# Altium PCB PCB2.PcbDoc (part 2 of 3)
Units mil, origin at the board's own origin, x right, y up, seen from the top; angles counter-clockwise.
Board outline 9010 x 4600 mil, 2 copper layers (Top Layer, Bottom Layer); 234 components, 289 nets, 937 pads, 186 vias.
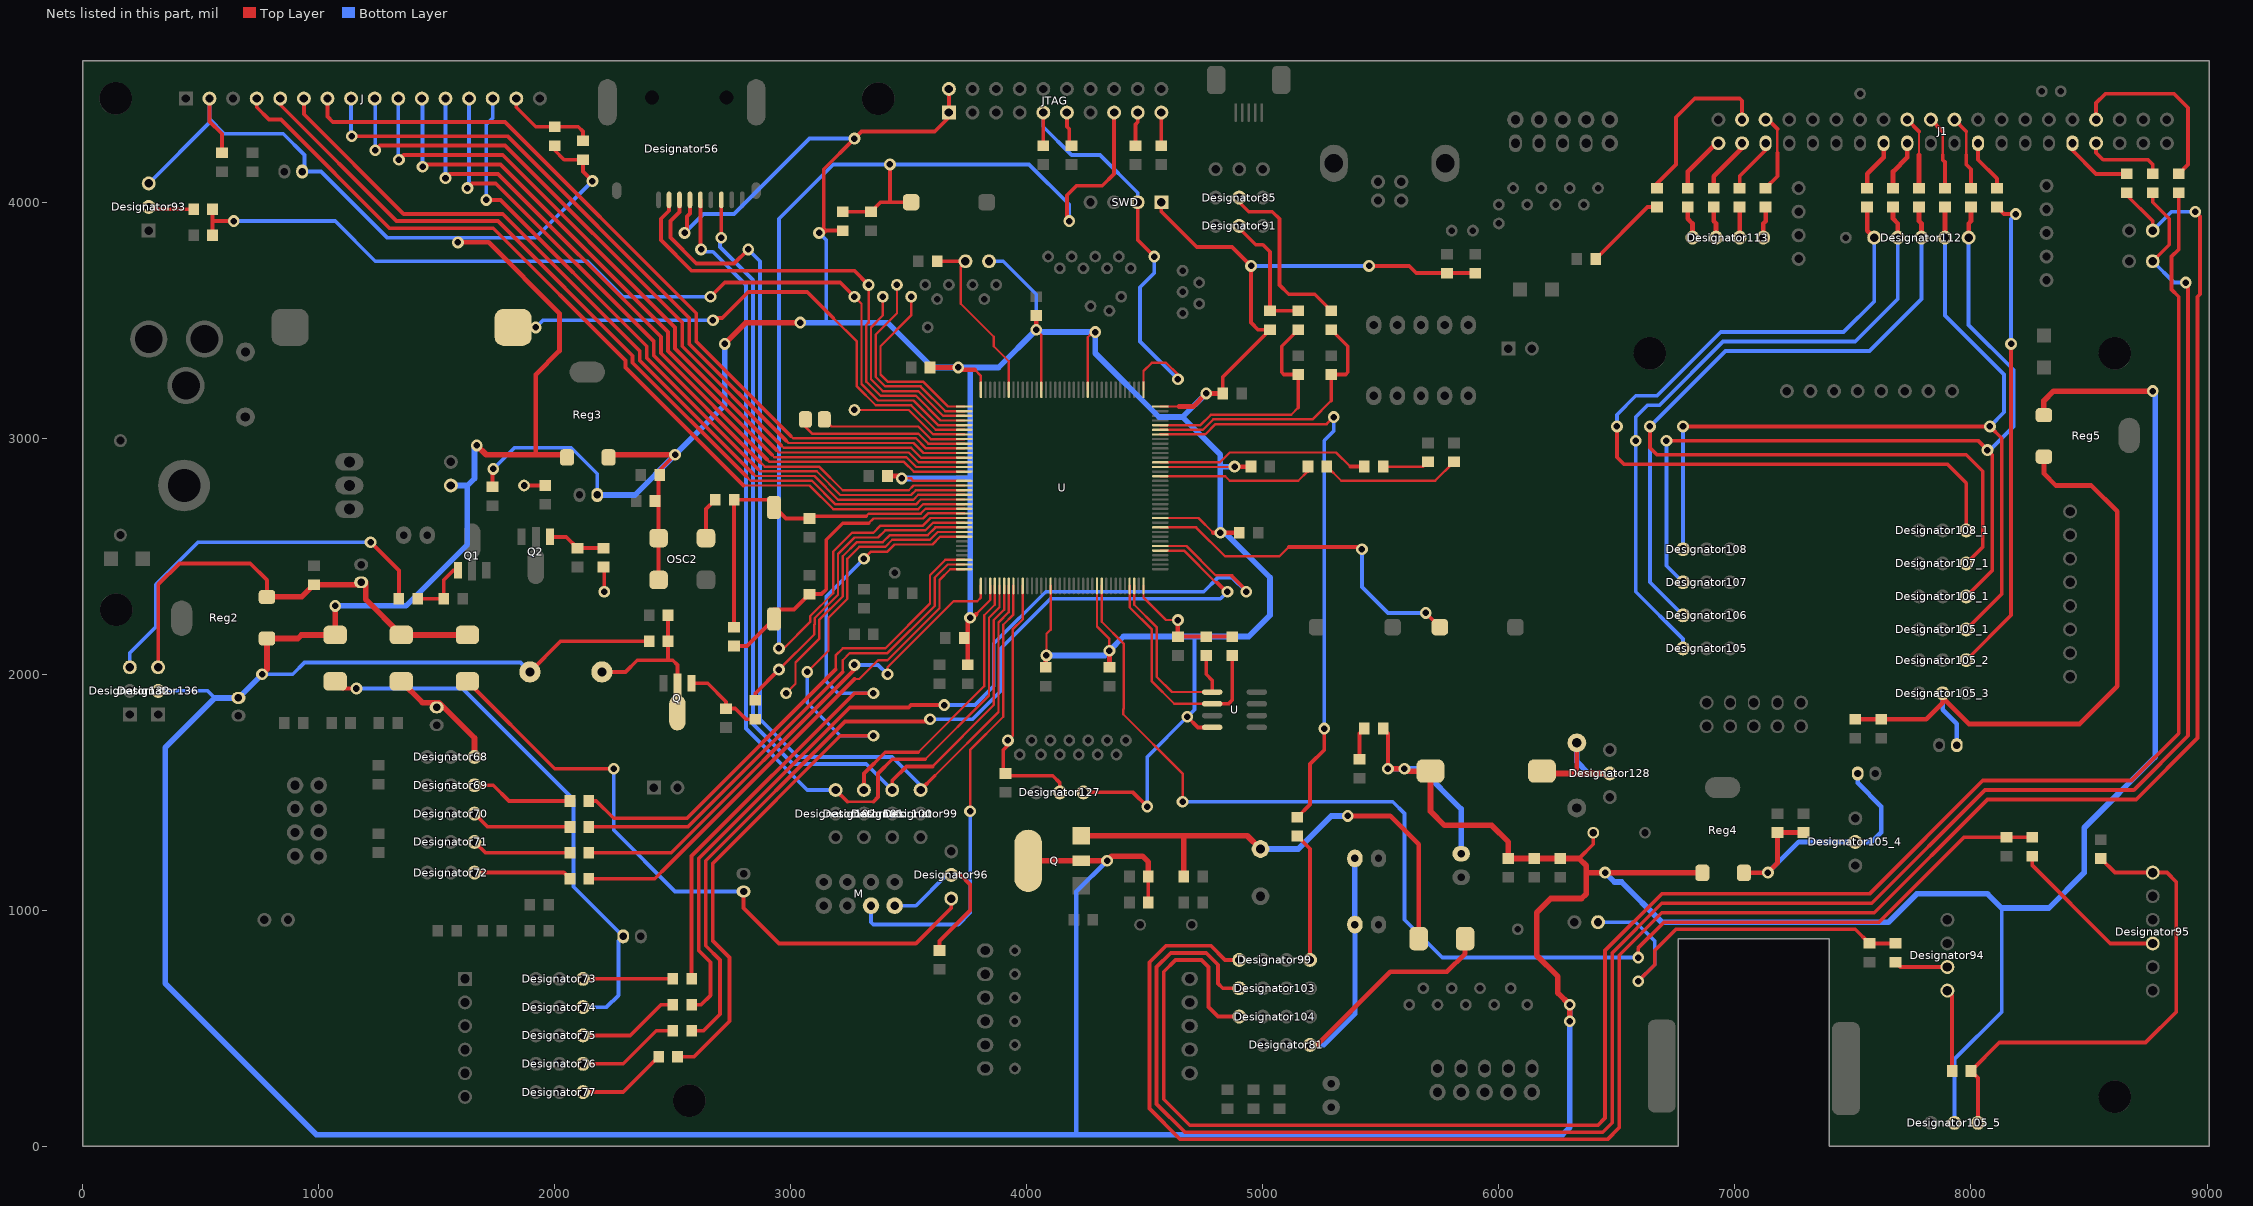
[diagram p2: the nets of this part, all layers, seen from the top]

## Via types
v1: diameter 50, hole 27.56, Top Layer to Bottom Layer, 186 vias

## Nets (pads, with @x,y where several pads share a name; then routed paths per layer and width w, separated by ;. In a path a pad name is that pad's centre, name@x,y a point inside that pad or via, vN(x,y) a via of type N, cw(c..) or ccw(c..) an arc to the next point about the centre after c; other vN are vias at no path point) (continued)
NewNet9: C7.0@4900,2600 C8.0@4950,2880 C9.0@4830,3190 C11.0@4040,3520 C12.0@3590,3300 C13.0@3410,2840 C18.0@3750,2040 C19.0@4080,2030 C20.0@4350,2030 C21.0@4640,2160 Designator56.Vdd Designator57.2 Designator127.3 Designator130.1 JTAG.Vcc OSC2.En OSC2.Vdd R33.0@4760,2160 R34.0@4870,2160 R36_6.0@5030,3460 R36_11.0@3220,3880 R36_20.0@5900,3700 R36_21.0@5780,3700 R54_1.0@2424.88,2733.86 R54_2.0@2444.88,2843.86 R55.0@3734.88,2153.86 R61.0@1736.14,2794.88 Reg3.Out SWD.VDD U.Vcc U.VDD_1 U.VDD_2 U.VDD_3 U.VDD_4 U.VDD_5 U.VDD_6 U.VDD_7 U.VDD_8 U.VDD_9 U.VDD_10 U.VDD_11 | length 18640.5
  Top Layer w10: v1(3470,2830) 3510,2830 3520.47,2819.53 U.VDD_5@3734.65,2819.53 ; 3780,3290 3805.51,3264.49 U.VDD_3@3805.51,3205.35 ; 3784.88,2254.88 3844.88,2314.88 U.VDD_4@3844.88,2374.65 ; v1(4040,3460) 4061.42,3438.58 U.VDD_11@4061.42,3205.35 ; v1(4083.37,2080) 4083.37,2171.79 4100.79,2189.21 U.VDD_6@4100.79,2374.65 ; U.VDD_10@4258.27,3205.35 4258.27,3428.27 v1@4270,3440 ; U.VDD_7@4297.64,2374.65 4297.64,2202.36 4350,2150 v1(4350,2100) ; U.VDD_1@4494.49,2374.65 4494.49,2325.51 4590,2230 v1(4640,2230) ; U.VDD_8@4565.35,2662.05 4727.95,2662.05 4790,2600 ; U.VDD_9@4565.35,2878.58 4878.58,2878.58 v1(4880,2880) ; U.VDD_2@4565.35,3134.49 4644.49,3134.49
  Top Layer w16: R61.0@1736.14,2794.88 1736.14,2866.14 v1(1740,2870) ; OSC2.En@2440,2400 OSC2.Vdd@2440,2577.16 2440,2860 v1(2510,2930) ; v1@2560,3890 2560,3940 2572.87,3952.87 Designator56.Vdd@2572.87,4010 ; R36_11.0@3220,3880 3150,3880 ; JTAG.Vcc@3670,4480 JTAG.Vcc@3670,4380 3670,4360 3610,4300 3300,4300 v1(3270,4270) 3140,4140 3140,3890 ; Designator127.3@4240,1500 4450,1500 v1(4510,1440) ; SWD.VDD@4570,4000 4570,3960 4720,3810 4870,3810 v1(4950,3730) 4950,3490 4980,3460 R36_6.0@5030,3460 4830,3260 C9.0@4830,3190 ; C21.0@4640,2160 R33.0@4760,2160 R34.0@4870,2160 ; v1(4680,1820) 4725,1775 U.Vcc@4785.51,1775 ; v1(5450,3730) 5620,3730 5650,3700 R36_21.0@5780,3700 R36_20.0@5900,3700 ; 3140,3890 3150,3880 ; 3140,3890 v1(3120,3870) 3140,3870 3150,3880
  Top Layer w20: C13.0@3410,2840 3460,2840 v1(3470,2830) ; C12.0@3590,3300 v1(3710,3300) ; v1@3720,3290 3780,3290 ; C18.0@3750,2040 3750,2230 v1(3760,2240) ; v1@3760,2230 3784.88,2254.88 ; v1(4040,3460) C11.0@4040,3520 ; C19.0@4080,2030 4080,2076.63 v1(4083.37,2080) ; C20.0@4350,2030 v1(4350,2100) ; C21.0@4640,2160 v1(4640,2230) ; 4644.49,3134.49 4704.49,3134.49 v1(4760,3190) C9.0@4830,3190 ; 4790,2600 v1(4820,2600) C7.0@4900,2600 ; v1(4880,2880) C8.0@4950,2880
  Top Layer w24: Reg3.Out@2228,2919 2239,2930 v1(2510,2930) ; v1(2720,3400) 2810,3490 v1(3040,3490)
  Bottom Layer w16: v1(1740,2870) 1830,2960 2070,2960 2180,2850 Designator130.1@2180,2760 ; v1(2550,3870) 2630,3950 2760,3950 3080,4270 v1(3270,4270) ; v1(3120,3870) 3150,3840 3150,3490 ; Designator57.2@3840,3750 3900,3750 4040,3610 v1(4040,3460) ; v1(4510,1440) 4510,1650 v1(4680,1820) 4710,1850 4710,2160 ; 4640,2160 v1(4640,2230) ; v1(4950,3730) v1(5450,3730)
  Bottom Layer w24: Designator130.1@2180,2760 2340,2760 v1(2510,2930) 2720,3140 v1(2720,3400) ; v1(3040,3490) 3150,3490 3410,3490 3600,3300 v1(3710,3300) 3880,3300 v1(4040,3460) 4050,3450 v1(4290,3450) 4290,3360 4560,3090 4660,3090 ; v1(3470,2830) 3760,2830 ; v1(3760,2240) 3760,2830 ; 3760,3300 3760,2830 ; v1(4083.37,2080) 4330,2080 v1(4350,2100) 4410,2160 4710,2160 4940,2160 5030,2250 5030,2410 4840,2600 v1(4820,2600) 4820,2880 ; v1(4760,3190) 4660,3090 ; v1(4880,2880) 4820,2880 ; 4660,3090 4820,2930 4820,2880
NewNet10: pad.0@1870,2800 R60.0@1960,2800 | length 90
  Top Layer w16: pad.0@1870,2800 R60.0@1960,2800
NewNet11: C28.2 C31.0@6040,1220 C34.0@6150,1220 C35.0@6260,1220 C36.0@590,4210 Designator49_1.2 Designator61.1 Designator93.Vcc5V Designator105_5.2 Designator118.0@5710,1590 Designator122.0@1070,2166.85 Designator133.1 Designator134.0 Designator136.2 Designator137.1 J.vcc@537.32,4439.37 LED4.0@5510,1770 Q.C R21.0@4514.88,1033.86 R22.0@4514.88,1143.86 R36_12.0@2120,4180 R36_13.0@2000,4240 R53.0@2400,2140 Reg2.In Reg3.In Reg4.In Reg5.In | length 27762.1
  Top Layer w16: J.vcc@537.32,4439.37 537.32,4342.68 590,4290 C36.0@590,4210 ; Designator49_1.2@1895,2010 2025,2140 R53.0@2400,2140 ; R36_13.0@2000,4240 2000,4220 2040,4180 R36_12.0@2120,4180 2120,4130 v1(2160,4090) ; R21.0@4514.88,1033.86 R22.0@4514.88,1143.86 ; LED4.0@5510,1770 5530,1750 v1(5530,1600) ; 6340,1220 6400,1280 Designator134.0@6400,1329
  Top Layer w20: v1(1590,3830) 1720,3830 2020,3530 2020,3370 1920,3270 1920,2930
  Top Layer w24: v1(760,2000) 781,2021 Reg2.In@781,2152 912,2152 926.85,2166.85 Designator122.0@1070,2166.85 v1(1070,2290) ; v1(1670,2970) 1710,2930 Reg3.In@2060,2930 ; 1920,2930 2041,2930 Reg3.In@2052,2919 ; Q.C@4250,1210 v1(4340,1210) 4360,1230 4490,1230 4514.88,1205.12 R22.0@4514.88,1143.86 ; v1(5530,1600) v1(5600,1600) 5610,1590 Designator118.0@5710,1590 5710,1420 5770,1360 5970,1360 6040,1290 C31.0@6040,1220 C34.0@6150,1220 C35.0@6260,1220 6340,1220 6370,1190 6370,1160 ; v1(6300,530) v1(6300,600) 6250,650 6250,720 6160,810 6160,990 6220,1050 6350,1050 6370,1070 6370,1160 ; Reg4.In@6862,1159 6451,1159 v1(6450,1160) 6370,1160 ; Reg5.In@8309,3098 8309,3159 8350,3200 v1(8770,3200)
  Bottom Layer w16: Designator93.Vcc5V@280,4080 537.32,4337.32 537.32,4352.68 ; Designator136.2@320,1930 530,1930 560,1900 ; J.vcc@537.32,4439.37 537.32,4352.68 ; v1(760,2000) 890,2000 940,2050 1855,2050 Designator49_1.2@1895,2010 ; Designator137.1@930,4130 1010,4130 1290,3850 1920,3850 v1(2160,4090) ; Designator137.1@940,4130 940,4200 850,4290 600,4290 537.32,4352.68 ; Designator105_5.2@7930,100 7930,370 8130,570 8130,1010
  Bottom Layer w20: 4210,50 4210,1080 v1(4340,1210)
  Bottom Layer w24: v1(760,2000) Designator133.1@660,1900 560,1900 350,1690 350,690 990,50 4210,50 6270,50 6300,80 v1(6300,530) v1(6300,600) ; Designator137.1@930,4130 Designator137.1@940,4130 ; v1(1070,2290) 1370,2290 1630,2550 1630,2800 ; Designator61.1@1560,2800 1630,2800 ; v1(1670,2970) 1660,2960 1660,2830 1630,2800 ; v1(5530,1600) v1(5600,1600) 5670,1600 5840,1430 C28.2@5840,1240 ; v1(6450,1160) 6490,1120 6520,1120 6690,950 7650,950 7770,1070 8070,1070 8130,1010 8330,1010 8480,1160 8480,1350 8780,1650 8780,3190 v1(8770,3200)
NewNet12: Q1.1@1590,2440 R58.0@1530,2320 R59.0@1420,2320 | length 266.6
  Top Layer w16: R59.0@1420,2320 R58.0@1530,2320 1530,2400 1570,2440 Q1.1@1590,2440
NewNet13: Designator132.3 R59.0@1340,2320 | length 1669.8
  Top Layer w16: v1(1220,2560) 1340,2440 R59.0@1340,2320
  Bottom Layer w16: Designator132.3@200,2030 200,2090 310,2200 310,2380 490,2560 v1(1220,2560)
NewNet14: pad.0@2210,2350 R57.0@2206.14,2454.88 | length 106.5
  Top Layer w16: R57.0@2206.14,2454.88 2210,2451.02 pad.0@2210,2350
NewNet15: Q2.1@1980,2582 R56.0@2096.14,2534.88 R57.0@2206.14,2534.88 | length 245.7
  Top Layer w16: Q2.1@1980,2582 2049.02,2582 R56.0@2096.14,2534.88 R57.0@2206.14,2534.88
NewNet16: LED4.0@5430,1770 R36_18.0@5410,1640 | length 110
  Top Layer w16: R36_18.0@5410,1640 LED4.0@5410,1750
NewNet17: C30.0@3910,1580 Designator127.2 U.PB0 | length 1113.7
  Top Layer w10: v1(3920,1720) 3940,1740 3940,2190 3982.68,2232.68 U.PB0@3982.68,2374.65
  Top Layer w16: v1(3920,1720) 3920,1700 3900,1680 3900,1600 3930,1570 4110,1570 4140,1540 Designator127.2@4140,1500
NewNet18: Designator49_1.1 Q.1@2520,1837 Q.2 R53.0@2480,2140 R54.0@2480,2250 | length 625
  Top Layer w16: Designator49_1.1@2200,2010 2300,2010 2350,2060 2500,2060 2520,2040 Q.2@2520,1954 ; 2480,2060 R53.0@2480,2140 R54.0@2480,2250
NewNet19: C.1 Designator125.0@5660,880 Q.E R23.0@4664.88,1143.86 | length 2135.2
  Top Layer w20: v1(5360,1400) 5540,1400 5660,1280 Designator125.0@5660,880
  Top Layer w24: Q.E@4230,1316 4670,1316 ; R23.0@4664.88,1143.86 4664.88,1310.88 4670,1316 ; C.1@4990,1260 4934,1316 4670,1316
  Bottom Layer w24: C.1@4990,1260 5150,1260 5290,1400 v1(5360,1400)
NewNet20: C15.2 C16.2 Designator81.3 Designator125.0@5856.85,880 | length 1798.2
  Top Layer w20: Designator81.3@5200,430 5230,430 5540,740 5780,740 5856.85,816.85 Designator125.0@5856.85,880
  Bottom Layer w20: Designator81.3@5200,430 5260,430 5390,560 C15.2@5390,940
  Bottom Layer w24: C15.2@5380,930 C15.2@5390,940 C16.2@5390,1220
NewNet21: Designator68.3 Designator124.0@1350,1970 Designator135.1 | length 489.4
  Top Layer w24: Designator124.0@1350,1970 1440,1880 1510,1880 1660,1730 Designator68.3@1660,1650
NewNet22: C.0@980,2380 Designator123.0@1630,2166.85 Designator124.0@1350,2166.85 Designator131.1 Designator136.3 Reg2.Out | length 1958.7
  Top Layer w16: Designator136.3@320,2030 320,2380 410,2470 710,2470 781,2399 Reg2.Out@781,2328
  Top Layer w24: Reg2.Out@781,2328 928,2328 C.0@980,2380 1170,2380 Designator131.1@1180,2390 1200,2390 1200,2316.85 Designator124.0@1350,2166.85 Designator123.0@1630,2166.85
NewNet23: Designator96.1 Designator123.0@1630,1970 Designator126.1 | length 2805.2
  Top Layer w16: Designator123.0@1630,1970 2000,1600 v1(2250,1600) ; Designator126.1@2800,1080 2800,1010 2950,860 3530,860 3680,1010 Designator96.1@3680,1050
  Bottom Layer w16: v1(2250,1600) 2250,1340 2510,1080 Designator126.1@2800,1080
NewNet24: Designator74.3 Designator122.0@1070,1970 Designator129.1 | length 2313.1
  Top Layer w16: Designator122.0@1070,1970 1100,1940 v1(1160,1940)
  Bottom Layer w16: v1(1160,1940) 1610,1940 2080,1470 2080,1100 Designator129.1@2290,890 2270,870 2270,640 2220,590 Designator74.3@2120,590
NewNet25: 
NewNet26: Q.1@2580,1962 R51.0@2850,1810 R52.0@2726.14,1854.88 | length 354
  Top Layer w16: Q.1@2582.88,1964.88 Q.1@2580,1962 2648,1962 2726.14,1883.86 R52.0@2726.14,1854.88 2765.12,1854.88 2810,1810 R51.0@2850,1810
NewNet27: R51.0@2850,1890 U.PC0 | length 1354.4
  Top Layer w10: v1(2950,2020) 3100,2170 3100,2210 3101,2211 3101,2237.87 3200,2336.87 3200,2510 3270,2580 3370,2580 3400,2610 3570,2610 3602.36,2642.36 U.PC0@3734.65,2642.36
  Top Layer w16: R51.0@2850,1890 2850,1920 v1(2950,2020)
NewNet28: Designator95.Vcc5v Designator105_5.3 R45.0@8000,320 R50.0@8550,1220 | length 2117.4
  Top Layer w16: Designator105_5.3@8030,100 8030,290 R45.0@8000,320 8120,440 8740,440 8870,570 8870,1120 8830,1160 Designator95.Vcc5v@8770,1160 8610,1160 R50.0@8550,1220
NewNet29: Designator95.Beep R49.0@8260,1230 | length 686.7
  Top Layer w16: R49.0@8260,1230 8260,1190 8590,860 Designator95.Beep@8770,860
NewNet30: R48.0@8150,1310 R49.0@8260,1310 U.PE10 | length 5429.1
  Top Layer w10: U.PE10@4317.32,2374.65 4317.32,2222.68 4410,2130 4410,1853.64 4409,1852.64 4409,1831 4660,1580 v1(4660,1460)
  Top Layer w16: v1(6590,800) 6590,840 6700,950 7610,950 7970,1310 R48.0@8150,1310 R49.0@8260,1310
  Bottom Layer w16: v1(4660,1460) 5550,1460 5600,1410 5600,960 5760,800 v1(6590,800)
NewNet31: Designator60.2 R46.0@7680,860 R47.0@7570,860 | length 1713.3
  Top Layer w16: v1(6590,700) 6660,770 6660,830 6750,920 7510,920 R47.0@7570,860 R46.0@7680,860
  Bottom Layer w16: Designator60.2@6420,950 6580,950 6660,870 6660,770 v1(6590,700)
NewNet32: Designator94.TX R46.0@7680,780 | length 228.3
  Top Layer w16: R46.0@7680,780 7700,760 Designator94.TX@7900,760
NewNet33: Designator94.Sel R45.0@7920,320 | length 348.3
  Top Layer w16: Designator94.Sel@7900,660 7920,640 R45.0@7920,320
NewNet34: C32.0@7620,1810 C33.0@7510,1810 Designator105_3.2 Designator120.1 Reg5.Out | length 2734.4
  Top Layer w20: C33.0@7510,1810 C32.0@7620,1810 7810,1810 7880,1880 Designator105_3.2@7880,1900 ; Designator105_3.2@7880,1920 Designator105_3.2@7880,1900 ; Reg5.Out@8309,2922 8309,2851 8360,2800 8510,2800 8620,2690 8620,1950 8460,1790 7990,1790 Designator105_3.2@7880,1900
  Bottom Layer w20: Designator105_3.2@7880,1920 7880,1850 7940,1790 Designator120.1@7940,1700 Designator120.1@7940,1690
NewNet35: C10.0@7180,1330 C29.0@7290,1330 Designator105_4.2 Designator121.1 Reg4.Out | length 1240.8
  Top Layer w16: Reg4.Out@7038,1159 Reg4.Out@7039,1160
  Top Layer w20: Reg4.Out@7039,1160 v1(7140,1160) 7180,1200 C10.0@7180,1330 C29.0@7290,1330
  Bottom Layer w20: v1(7140,1160) 7270,1290 Designator105_4.2@7510,1290 7580,1290 7620,1330 7620,1440 7520,1540 Designator121.1@7520,1580
NewNet36: Designator118.0@6182.44,1590 Designator121.K Designator128.2 | length 661.6
  Top Layer w20: 6330,1580 6330.43,1580.43 Designator121.K@6330.43,1709.6
  Top Layer w24: Designator118.0@6182.44,1590 6192.44,1580 Designator128.2@6470,1580
  Bottom Layer w24: Designator121.K@6330.43,1709.6 6330.43,1629.57 6380,1580 Designator128.2@6470,1580
NewNet37: R36_16.0@550,3860 R36_17.0@550,3970 U.PE6 | length 3901.5
  Top Layer w10: v1(3270,3600) 3300,3570 3300,3230 3370,3160 3520,3160 3624.25,3055.75 U.PE6@3734.65,3055.75
  Top Layer w16: R36_16.0@550,3860 550,3920 ; R36_17.0@550,3970 550,3920 ; v1(640,3920) 550,3920 ; v1(2660,3600) 2720,3660 3210,3660 v1(3270,3600)
  Bottom Layer w16: v1(640,3920) 1070,3920 1240,3750 2140,3750 2290,3600 v1(2660,3600)
NewNet38: Designator93.Out R36_17.0@470,3970 | length 194.1
  Top Layer w16: Designator93.Out@280,3980 290,3970 R36_17.0@470,3970
NewNet39: Designator99.4 R44.0@5146.14,1314.88 | length 547.2
  Top Layer w16: R44.0@5146.14,1314.88 5195.64,1265.38 5200,1261.02 5200,860 Designator99.4@5200,790
NewNet40: R44.0@5146.14,1394.88 U.PA10-USART1-RX | length 2524
  Top Layer w10: U.PA10-USART1-RX@4565.35,3016.38 4756.38,3016.38 4800,3060 5270,3060 v1(5300,3090)
  Top Layer w16: R44.0@5146.14,1394.88 5200,1448.74 5200,1620 5260,1680 v1(5260,1770)
  Bottom Layer w16: v1(5260,1770) 5260,2990 5300,3030 v1(5300,3090)
NewNet41: Designator104.1 R43.0@8880,4040 | length 8843.6
  Top Layer w16: Designator104.1@4900,550 4810,550 4770,590 4770,760 4740,790 4630,790 4580,740 4580,200 4690,90 6420,90 6450,120 6450,830 6690,1070 7570,1070 8050,1550 8680,1550 8880,1750 8880,3600 8850,3630 8850,3770 8880,3800 R43.0@8880,4040
NewNet42: J1.GPIO4 R43.0@8880,4120 | length 798
  Top Layer w16: J1.GPIO4@8530,4350 8530,4420 8570,4460 8860,4460 8920,4400 8920,4160 R43.0@8880,4120
NewNet43: Designator105_2.3 R42.0@8110,3980 | length 2069.4
  Top Layer w16: Designator105_2.3@7980,2060 8170,2250 v1(8170,3400) ; R42.0@8110,3980 8140,3950 v1(8190,3950)
  Bottom Layer w16: v1(8170,3400) 8170,3930 v1(8190,3950)
NewNet44: J1.GPIO24 R42.0@8110,4060 | length 223.1
  Top Layer w16: J1.GPIO24@8030,4250 8030,4180 8110,4100 R42.0@8110,4060
NewNet45: Designator99.1@4900,790 Designator115.2 R41.0@8660,4040 | length 9340.6
  Top Layer w16: Designator99.1@4900,790 4840,790 4780,850 4590,850 4520,780 4520,160 4650,30 6460,30 6510,80 6510,810 6690,990 7590,990 8070,1470 8700,1470 8960,1730 8960,3600 8970,3610 8970,3940 v1(8950,3960) ; R41.0@8660,4040 8660,4030 8770,3920 Designator115.2@8770,3880
  Bottom Layer w16: Designator115.2@8770,3880 8850,3960 v1(8950,3960)
NewNet46: J1.GPIO15-RX R41.0@8660,4120 | length 301.4
  Top Layer w16: J1.GPIO15-RX@8430,4250 8430,4220 8530,4120 R41.0@8660,4120
NewNet47: Designator103.1 Designator116.2 R40.0@8770,4040 | length 9046.5
  Top Layer w16: Designator103.1@4900,670 4830,670 4810,690 4810,770 4760,820 4610,820 4550,760 4550,180 4670,60 6440,60 6480,100 6480,820 6690,1030 7580,1030 8060,1510 8690,1510 8920,1740 v1@8920,3660 ; Designator116.2@8770,3750 8840,3820 8840,3930 8770,4000 R40.0@8770,4040
  Bottom Layer w16: Designator116.2@8770,3750 8860,3660 v1(8910,3660)
NewNet48: J1.GPIO14-TX R40.0@8770,4120 | length 340.7
  Top Layer w16: J1.GPIO14-TX@8530,4250 8530,4210 8560,4180 8750,4180 8770,4160 R40.0@8770,4120
NewNet49: LED3.0@6410,3760 R36_15.0@6670,3980 | length 351.1
  Top Layer w16: LED3.0@6410,3760 6630,3980 R36_15.0@6670,3980
NewNet50: J1.GPIO26 R36_15.0@6670,4060 | length 730.4
  Top Layer w16: R36_15.0@6670,4060 6670,4080 6750,4160 6750,4360 6830,4440 7020,4440 7030,4430 J1.GPIO26@7030,4350
NewNet51: Designator57.1 R36_14.0@3620,3750 U.BOOT0 | length 757.3
  Top Layer w10: Designator57.1@3740,3750 3720,3730 3720,3570 3860,3430 3860,3390 3923.62,3326.38 U.BOOT0@3923.62,3205.35
  Top Layer w16: R36_14.0@3620,3750 Designator57.1@3740,3750
NewNet52: J.BLA R36_12.0@2120,4260 R36_13.0@2000,4320 | length 401.9
  Top Layer w16: J.BLA@1837.32,4439.37 1837.32,4402.68 1920,4320 R36_13.0@2000,4320 2100,4320 2120,4300 R36_12.0@2120,4260
NewNet53: C27.0@3340,3960 JTAG.NRST R36_11.0@3220,3960 RST.1 U.NRST | length 5488.3
  Top Layer w10: v1@2950,2130 2970,2110 3082,2222 3082,2245.74 3180,2343.74 3180,2520 3260,2600 3350,2600 3380,2630 3560,2630 3592.05,2662.05 U.NRST@3734.65,2662.05
  Top Layer w16: R36_11.0@3220,3960 C27.0@3340,3960 3380,4000 3420,4000 ; v1(3420,4160) 3420,4000 ; RST.1@3510,4000 3420,4000 ; v1@4170,3930 4170,4030 4210,4070 4320,4070 4370,4120 JTAG.NRST@4370,4380
  Bottom Layer w16: v1(2950,2110) 2950,3930 3180,4160 v1(3420,4160) 4010,4160 4180,3990 v1(4180,3920)
NewNet54: JTAG.TCLK--SWCLK-pulldown R36_10.0@4070,4240 SWD.SWCLK U.PA14-TCK-SWCLK | length 1906.2
  Top Layer w10: U.PA14-TCK-SWCLK@4494.49,3205.35 4494.49,3284.49 4530,3320 4590,3320 4640,3270 v1(4640,3250)
  Top Layer w16: R36_10.0@4070,4240 JTAG.TCLK--SWCLK-pulldown@4070,4380 ; SWD.SWCLK@4470,4000 4470,3840 v1(4540,3770)
  Bottom Layer w16: JTAG.TCLK--SWCLK-pulldown@4070,4380 4070,4320 4190,4200 4310,4200 4470,4040 SWD.SWCLK@4470,4000 ; v1(4540,3770) 4540,3700 4480,3640 4480,3410 v1(4640,3250)
NewNet55: JTAG.pullDown@4170,4380 R36_9.0@4190,4240 | length 144.1
  Top Layer w16: JTAG.pullDown@4170,4380 4170,4320 4180,4310 R36_9.0@4180,4240
NewNet56: JTAG.pulldown R36_8.0@4460,4240 | length 144.1
  Top Layer w16: R36_8.0@4460,4240 4460,4330 4470,4340 JTAG.pulldown@4470,4380
NewNet57: JTAG.pullDown@4570,4380 R36_7.0@4570,4240 | length 140
  Top Layer w16: R36_7.0@4570,4240 JTAG.pullDown@4570,4380
NewNet58: Designator91.2 R36_5.0@5150,3540 R36_6.0@5030,3540 | length 551.4
  Top Layer w16: Designator91.2@4900,3900 4900,3890 4970,3820 5000,3820 5030,3790 R36_6.0@5030,3540 R36_5.0@5150,3540
NewNet59: C26.0@5150,3270 R36_5.0@5150,3460 U.PA12-USB-DP | length 1038.5
  Top Layer w10: U.PA12-USB-DP@4565.35,3055.75 4735.75,3055.75 4780,3100 5120,3100 5150,3130
  Top Layer w16: 5150,3130 C26.0@5150,3270 5090,3270 5080,3280 5080,3390 R36_5.0@5150,3460
NewNet60: C25.0@5290,3270 R36_4.0@5290,3460 U.PA11-USB-DM | length 1169.1
  Top Layer w10: U.PA11-USB-DM@4565.35,3036.06 4746.06,3036.06 4790,3080 5210,3080 5290,3160
  Top Layer w16: 5290,3160 C25.0@5290,3270 5350,3270 5360,3280 5360,3390 R36_4.0@5290,3460
NewNet61: Designator85.2 R36_4.0@5290,3540 | length 764.6
  Top Layer w16: Designator85.2@4900,4020 4900,4000 4940,3960 5040,3960 5070,3930 5070,3650 5110,3610 5220,3610 R36_4.0@5290,3540
NewNet62: LED1.0@5271.22,2880.83 R36_3.0@5810,2900 | length 597.1
  Top Layer w10: LED1.0@5271.22,2880.83 5332.05,2820 5730,2820 R36_3.0@5810,2900
NewNet63: LED2.0@5430,2880 U.PC6 | length 906.8
  Top Layer w10: U.PC6@4565.35,2898.27 4818.27,2898.27 4860,2940 5310,2940 5370,2880
  Top Layer w16: 5370,2880 LED2.0@5430,2880
NewNet64: LED2.0@5510,2880 R36_2.0@5700,2900 | length 198.3
  Top Layer w10: LED2.0@5510,2880 5680,2880 R36_2.0@5700,2900
NewNet65: LED1.0@5191.22,2880.83 U.PG8 | length 670.5
  Top Layer w10: U.PG8@4565.35,2839.21 4840.79,2839.21 4860,2820 5150,2820 LED1.0@5191.22,2861.22
  Top Layer w16: LED1.0@5191.22,2861.22 LED1.0@5191.22,2880.83
NewNet66: KEY2.1 U.PD13 | length 1486.6
  Top Layer w10: U.PD13@4565.35,2622.68 4717.32,2622.68 4840,2500 5070,2500 5110,2540
  Top Layer w16: 5110,2540 5410,2540 v1(5420,2530) ; v1(5690,2260) KEY2.1@5750,2200
  Bottom Layer w16: v1(5420,2530) 5420,2370 5530,2260 v1(5690,2260)
NewNet67: Designator113.1 R36_1.0@6800,3980 | length 138.3
  Top Layer w20: R36_1.0@6800,3980 6800,3930 6820,3910 Designator113.1@6820,3850
NewNet68: J1.GPIO21-SCLK R36_1.0@6800,4060 | length 249.7
  Top Layer w20: R36_1.0@6800,4060 6800,4130 6920,4250 J1.GPIO21-SCLK@6930,4250
NewNet69: Designator113.2 R37_1.0@6910,3980 | length 134.1
  Top Layer w20: R37_1.0@6910,3980 6910,3920 6920,3910 Designator113.2@6920,3850
NewNet70: J1.GPIO20-MOSI R37_1.0@6910,4060 | length 239.7
  Top Layer w20: R37_1.0@6910,4060 6910,4110 7030,4230 J1.GPIO20-MOSI@7030,4250
NewNet71: Designator113.3 R38_1.0@7020,3980 | length 130
  Top Layer w20: Designator113.3@7020,3850 R38_1.0@7020,3980
NewNet72: J1.GPIO16-CE0 R38_1.0@7020,4060 | length 235.6
  Top Layer w16: R38_1.0@7020,4060 7020,4110 7130,4220 J1.GPIO16-CE0@7130,4250
NewNet73: Designator113.4 R39_1.0@7130,3980 | length 134.1
  Top Layer w20: Designator113.4@7120,3850 7120,3910 7130,3920 R39_1.0@7130,3980
NewNet74: J1.GPIO19-MISO R39_1.0@7130,4060 | length 337.3
  Top Layer w10: 7180,4210 7180,4310
  Top Layer w16: R39_1.0@7130,4060 7180,4110 7180,4210 ; J1.GPIO19-MISO@7130,4350 7140,4350 7180,4310
NewNet75: Designator106_1.3 Designator107.1 Designator112.5 R39.0@8000,3980 | length 3843.7
  Top Layer w16: v1(6710,2990) 8030,2990 v1(8070,2950) 8090,2930 8090,2440 Designator106_1.3@7980,2330
  Top Layer w20: Designator112.5@7990,3850 7990,3910 8000,3920 R39.0@8000,3980
  Bottom Layer w16: v1@6710,3000 v1(6710,2990) 6710,2460 Designator107.1@6780,2390 ; Designator112.5@7990,3850 7990,3480 8180,3290 8180,3050 v1@8080,2950
NewNet76: J1.GPIO10-MOSI R39.0@8000,4060 | length 319
  Top Layer w10: 7980,4200 7980,4300
  Top Layer w16: J1.GPIO10-MOSI@7930,4350 7980,4300 ; 7980,4200 7980,4160 8000,4140 R39.0@8000,4060
NewNet77: Designator105_1.3 Designator108.1 Designator112.4 R38.0@7890,3980 | length 3821.2
  Top Layer w16: v1(6780,3050) v1(8080,3050) 8130,3000 8130,2340 Designator105_1.3@7980,2190
  Top Layer w20: Designator112.4@7890,3850 R38.0@7890,3980
  Bottom Layer w16: Designator108.1@6780,2530 v1(6780,3050) ; Designator112.4@7890,3850 7890,3520 8140,3270 8140,3110 v1(8080,3050)
NewNet78: J1.GPIO9-MISO R38.0@7890,4060 | length 314.9
  Top Layer w10: 7880,4200 7880,4300
  Top Layer w16: J1.GPIO9-MISO@7830,4350 7880,4300 ; 7880,4200 7880,4180 7890,4170 R38.0@7890,4060
NewNet79: Designator106.1 Designator107_1.3 Designator112.3 R37.0@7780,3980 | length 4586.2
  Top Layer w16: v1(6640,3050) 6640,2960 6670,2930 7980,2930 8050,2860 8050,2540 Designator107_1.3@7980,2470
  Top Layer w20: R37.0@7780,3980 7780,3920 7790,3910 Designator112.3@7790,3850
  Bottom Layer w16: Designator106.1@6780,2250 6640,2390 v1(6640,3050) 6960,3370 7570,3370 7790,3590 Designator112.3@7790,3850
NewNet80: J1.GPIO11-SCLK R37.0@7780,4060 | length 310.7
  Top Layer w10: 7780,4200 7780,4300
  Top Layer w16: J1.GPIO11-SCLK@7730,4350 7780,4300
  Top Layer w20: R37.0@7780,4060 7780,4200
NewNet81: Designator105.1 Designator112.2 R36.0@7670,3980 | length 2778.2
  Top Layer w20: R36.0@7670,3980 7670,3930 7690,3910 Designator112.2@7690,3850
  Bottom Layer w16: Designator105.1@6780,2110 6780,2150 6580,2350 v1(6580,2990) 6580,3090 6630,3140 6680,3140 6950,3410 7510,3410 7690,3590 Designator112.2@7690,3850
NewNet82: J1.GPIO8-CE0 R36.0@7670,4060 | length 214.9
  Top Layer w20: R36.0@7670,4060 7670,4130 7730,4190 J1.GPIO8-CE0@7730,4250
NewNet83: Designator108_1.3 Designator112.1 R35.0@7560,3980 | length 3621
  Top Layer w16: v1(6500,3050) 6500,2920 6530,2890 7900,2890 7980,2810 Designator108_1.3@7980,2610
  Top Layer w20: R35.0@7560,3980 7560,3880 Designator112.1@7590,3850
  Bottom Layer w16: v1@6510,3040 v1(6500,3050) 6500,3100 6580,3180 6670,3180 6940,3450 7460,3450 7590,3580 Designator112.1@7590,3850
NewNet84: J1.GPIO7-CE1 R35.0@7560,4060 | length 219
  Top Layer w20: R35.0@7560,4060 7560,4120 7630,4190 J1.GPIO7-CE1@7630,4250
NewNet85: R34.0@4870,2080 U.PB10-I2C2-SCK U.SCL | length 1019.4
  Top Layer w10: U.PB10-I2C2-SCK@4435.43,2374.65 4435.43,2284.57 4530,2190 4530,1970 4625,1875 U.SCL@4785.51,1875
  Top Layer w16: U.SCL@4785.51,1875 4855,1875 4870,1890 R34.0@4870,2080
NewNet86: R33.0@4760,2080 U.PB11-I2C2-SDA U.SDA | length 852
  Top Layer w10: U.PB11-I2C2-SDA@4455.12,2374.65 4455.12,2294.88 4550,2200 4550,1990 4615,1925 U.SDA@4785.51,1925
  Top Layer w16: R33.0@4760,2080 4760,2000 4785.51,1974.49 U.SDA@4785.51,1925
NewNet87: C24.0@3630,830 Designator96.2 M.VCC | length 724.3
  Top Layer w16: C24.0@3630,830 3630,870 3760,1000 3760,1110 3720,1150 Designator96.2@3680,1150
  Bottom Layer w16: M.VCC@3440,1020 3530,1020 3660,1150 Designator96.2@3680,1150
NewNet88: Designator73.3 R32.0@2500,710 | length 380
  Top Layer w16: Designator73.3@2120,710 R32.0@2500,710
NewNet89: R32.0@2580,710 U.PC3 | length 2846.1
  Top Layer w10: v1(3310,2490) 3340,2520 3410,2520 3440,2550 3600,2550 3633.31,2583.31 U.PC3@3734.65,2583.31
  Top Layer w16: R32.0@2580,710 2580,1230 3270,1920 v1(3350,1920)
  Bottom Layer w16: v1(3310,2490) 3150,2330 3150,1970 3200,1920 v1(3350,1920)
NewNet90: Designator75.3 R31.0@2500,600 | length 433.8
  Top Layer w16: Designator75.3@2120,470 2320,470 2450,600 R31.0@2500,600
NewNet91: R31.0@2580,600 U.PD9-USART3-RX | length 4190.3
  Top Layer w10: U.PD9-USART3-RX@4565.35,2543.94 4676.06,2543.94 4800,2420 4860,2420 ; 4860,2420 4870,2420 4930,2360 v1(4930,2350) 4860,2420
  Top Layer w16: R31.0@2580,600 2620,600 2660,640 2660,780 2610,830 2610,1220 3250,1860 3500,1860 3510,1870 v1(3650,1870)
  Bottom Layer w16: v1(3650,1870) 3780,1870 3860,1950 3860,2130 4080,2350 4750,2350 4810,2410 4870,2410 v1(4930,2350)
NewNet92: Designator76.3 R30.0@2500,490 | length 438
  Top Layer w16: Designator76.3@2120,350 2290,350 2430,490 R30.0@2500,490
NewNet93: R30.0@2580,490 U.PD8-USART3-TX | length 4020.7
  Top Layer w10: U.PD8-USART3-TX@4565.35,2524.25 4665.75,2524.25 4800,2390 ; 4800,2390 4840,2350 v1(4850,2350) 4810,2390 4800,2390
  Top Layer w16: R30.0@2580,490 2630,490 2700,560 2700,790 2640,850 2640,1210 3230,1800 v1@3580,1800
  Bottom Layer w16: v1(3590,1810) 3770,1810 3890,1930 3890,2110 4100,2320 4820,2320 v1(4850,2350)
NewNet94: Designator77.3 R29.0@2440,380 | length 387.6
  Top Layer w16: Designator77.3@2120,230 2290,230 R29.0@2440,380 R29.0@2443.86,383.86
NewNet95: R29.0@2520,380 U.PC2 | length 3444.7
  Top Layer w10: v1(3070,2010) 3160,2100 3160,2240 3240,2320 3240,2490 3290,2540 3400,2540 3430,2570 3590,2570 3622.99,2602.99 U.PC2@3734.65,2602.99
  Top Layer w16: R29.0@2520,380 2590,380 2740,530 2740,800 2670,870 2670,1200 3210,1740 v1(3350,1740)
  Bottom Layer w16: v1(3070,2010) 3070,1880 3210,1740 v1(3350,1740)
NewNet96: Designator69.3 R28.0@2064.88,1463.86 | length 432.3
  Top Layer w16: Designator69.3@1660,1530 1740,1530 1806.14,1463.86 R28.0@2064.88,1463.86
NewNet97: R28.0@2144.88,1463.86 U.PA0-WKUP | length 2179.3
  Top Layer w10: 3190,2020 3190,2080 3220,2110 3400,2110 3590,2300 3590,2420 3654.88,2484.88 U.PA0-WKUP@3734.65,2484.88
  Top Layer w16: R28.0@2144.88,1463.86 2176.14,1463.86 2250,1390 2560,1390 3190,2020
NewNet98: Designator70.3 R27.0@2064.88,1353.86 | length 428.1
  Top Layer w16: Designator70.3@1660,1410 1716.14,1353.86 R27.0@2064.88,1353.86
NewNet99: R27.0@2144.88,1353.86 U.PA1 | length 2149.7
  Top Layer w10: 3220,2010 3220,2060 3250,2090 3410,2090 3610,2290 3610,2410 3665.2,2465.2 U.PA1@3734.65,2465.2
  Top Layer w16: R27.0@2144.88,1353.86 2533.86,1353.86 2563.86,1353.86 3220,2010
NewNet100: Designator72.3 R26.0@2064.88,1133.86 | length 415.7
  Top Layer w16: Designator72.3@1660,1160 2038.74,1160 R26.0@2064.88,1133.86
NewNet101: R26.0@2144.88,1133.86 U.PA2-USART2TX | length 2203.4
  Top Layer w10: 3270,1980 3290,1980 3370,2060 3410,2060 3630,2280 3630,2400 3675.51,2445.51 U.PA2-USART2TX@3734.65,2445.51
  Top Layer w16: R26.0@2144.88,1133.86 2423.86,1133.86 2480,1190 3270,1980
NewNet102: Designator71.3 R25.0@2064.88,1243.86 | length 424
  Top Layer w16: Designator71.3@1660,1290 1706.14,1243.86 R25.0@2064.88,1243.86
NewNet103: R25.0@2144.88,1243.86 U.PA3-USART2RX | length 2220.2
  Top Layer w10: v1@3270,2020 v1(3270,2040) ; v1(3410,2000) 3410,2030 3690,2310 3790,2310 3805.51,2325.51 U.PA3-USART2RX@3805.51,2374.65
  Top Layer w16: R25.0@2144.88,1243.86 2493.86,1243.86 v1@3270,2020
  Bottom Layer w16: v1(3270,2040) 3370,2040 v1(3410,2000)
NewNet104: OSC2.Out R.0@2680,2740 | length 179.1
  Top Layer w16: OSC2.Out@2640.79,2577.16 2640.79,2700.79 R.0@2680,2740
NewNet105: C22.0@3080,2660 R1.0@2760,2200 R.0@2760,2740 U.OSC_IN Xtal.1 | length 1591.6
  Top Layer w10: 3320,2670 3330,2680 3550,2680 3571.42,2701.42 U.OSC_IN@3734.65,2701.42
  Top Layer w16: R1.0@2760,2200 R.0@2760,2740 2922.2,2740 2929.06,2746.85 2929.06,2710.94 2980,2660 C22.0@3080,2660 3090,2670 3320,2670
NewNet106: C23.0@3080,2340 R1.0@2760,2120 U.OSC_OUT Xtal.2 | length 1313.8
  Top Layer w10: 3330,2640 3350,2660 3560,2660 3581.73,2681.73 U.OSC_OUT@3734.65,2681.73
  Top Layer w16: R1.0@2760,2120 2814.65,2120 Xtal.2@2929.06,2234.41 ; Xtal.2@2929.06,2274.41 3014.41,2274.41 C23.0@3080,2340 3130,2340 3150,2360 3150,2570 3220,2640 3330,2640
NewNet107: pad.0@3510,3600 U.PE2 | length 794.6
  Top Layer w10: pad.0@3510,3600 3510,3520 3380,3390 3380,3270 3410,3240 3560,3240 3665.51,3134.49 U.PE2@3734.65,3134.49
NewNet108: pad.0@3450,3650 U.PE3 | length 862.1
  Top Layer w10: pad.0@3450,3650 3450,3530 3360,3440 3360,3260 3400,3220 3550,3220 3655.2,3114.8 U.PE3@3734.65,3114.8
NewNet109: pad.0@3390,3600 U.PE4 | length 829.5
  Top Layer w10: pad.0@3390,3600 3390,3520 3340,3470 3340,3250 3390,3200 3540,3200 3644.88,3095.12 U.PE4@3734.65,3095.12
NewNet110: Designator56.CS U.PE5 | length 2039.9
  Top Layer w10: v1(3330,3650) 3330,3490 3320,3480 3320,3240 3380,3180 3530,3180 3634.57,3075.43 U.PE5@3734.65,3075.43
  Top Layer w16: Designator56.CS@2484.29,4010 2484.29,3964.29 2450,3930 2450,3840 2580,3710 3270,3710 v1(3330,3650)
NewNet111: Batt..PLUS U.VBAT | length 2208.7
  Top Layer w10: 3180,3510 3280,3410 3280,3220 3360,3140 3510,3140 3613.94,3036.06 U.VBAT@3734.65,3036.06
  Top Layer w16: v1(2670,3500) 2680,3510 2710,3510 2820,3620 3070,3620 3180,3510
  Bottom Layer w16: v1@1935,3485 1950,3500 v1(2670,3500)
  other v1: 1920,3470
NewNet112: pad.0@3270,3120 U.PC13-TAMPER-RTC | length 507.6
  Top Layer w10: pad.0@3270,3120 3500,3120 3603.62,3016.38 U.PC13-TAMPER-RTC@3734.65,3016.38
NewNet113: U.PC14-OSC32_IN Xtal.0@3142,3080 | length 627.2
  Top Layer w10: Xtal.0@3142,3080 3172,3050 3540,3050 3593.31,2996.69 U.PC14-OSC32_IN@3734.65,2996.69
NewNet114: U.PC15-OSC32_OUT Xtal.0@3062,3080 | length 734.1
  Top Layer w10: Xtal.0@3062,3080 3062,3048 3090,3020 3540,3020 3582.99,2977.01 U.PC15-OSC32_OUT@3734.65,2977.01
NewNet115: J.DB0 U.PF0 | length 3426.4
  Top Layer w10: 3000,3010 3010,3000 3530,3000 3572.68,2957.32 U.PF0@3734.65,2957.32
  Top Layer w16: J.DB0@1037.32,4439.37 1037.32,4362.68 1060,4340 1790,4340 2600,3530 2600,3410 3000,3010
NewNet116: J.DB1 U.PF1 | length 3375.6
  Top Layer w10: 2980,2990 2990,2980 3520,2980 3562.36,2937.64 U.PF1@3734.65,2937.64
  Top Layer w16: v1(1140,4280) 1800,4280 2570,3510 2570,3400 2980,2990
  Bottom Layer w16: J.DB1@1137.32,4439.37 1137.32,4282.68 v1(1140,4280)
NewNet117: J.DB2 U.PF2 | length 3329.6
  Top Layer w10: 2960,2970 2970,2960 3510,2960 3552.05,2917.95 U.PF2@3734.65,2917.95
  Top Layer w16: v1(1240,4220) 1260,4240 1790,4240 2540,3490 2540,3390 2960,2970
  Bottom Layer w16: J.DB2@1237.32,4439.37 1240,4436.69 v1(1240,4220)
NewNet118: J.DB3 U.PF3 | length 3241.5
  Top Layer w10: 2940,2950 2950,2940 3500,2940 3541.73,2898.27 U.PF3@3734.65,2898.27
  Top Layer w16: v1(1340,4180) 1360,4200 1780,4200 2510,3470 2510,3380 2940,2950
  Bottom Layer w16: v1@1337.32,4192.68 J.DB3@1337.32,4439.37
NewNet119: J.DB4 U.PF4 | length 3166.9
  Top Layer w10: 2920,2930 2930,2920 3490,2920 3531.42,2878.58 U.PF4@3734.65,2878.58
  Top Layer w16: v1(1440,4150) 1450,4160 1770,4160 2480,3450 2480,3370 2920,2930
  Bottom Layer w16: J.DB4@1437.32,4439.37 1440,4436.69 v1(1440,4150)
NewNet120: J.DB5 U.PF5 | length 3108.3
  Top Layer w10: 2900,2910 2910,2900 3480,2900 3521.1,2858.9 U.PF5@3734.65,2858.9
  Top Layer w16: v1(1537.32,4102.68) 1554.65,4120 1760,4120 2450,3430 2450,3360 2900,2910
  Bottom Layer w16: J.DB5@1537.32,4439.37 v1(1537.32,4102.68) v1@1540,4100
NewNet121: J.DB6 U.PF6 | length 3077.2
  Top Layer w10: 2870,2900 2890,2880 3120,2880 3220,2780 3500,2780 3519.84,2799.84 U.PF6@3734.65,2799.84
  Top Layer w16: v1(1630,4060) 1650,4080 1750,4080 2420,3410 2420,3350 2870,2900
  Bottom Layer w16: v1(1630,4060) 1637.32,4067.32 J.DB6@1637.32,4439.37
NewNet122: J.DB7 U.PF7 | length 3020.7
  Top Layer w10: 2860,2870 2870,2860 3110,2860 3210,2760 3510,2760 3530.16,2780.16 U.PF7@3734.65,2780.16
  Top Layer w16: v1(1710,4010) 1770,4010 2390,3390 2390,3340 2860,2870
  Bottom Layer w16: v1(1710,4010) 1710,4330 1737.32,4357.32 J.DB7@1737.32,4439.37
NewNet123: J.E U.PF8 | length 3572.2
  Top Layer w10: 2840,2850 2850,2840 3100,2840 3200,2740 3520,2740 3540.47,2760.47 U.PF8@3734.65,2760.47
  Top Layer w16: J.E@937.32,4439.37 937.32,4372.68 1360,3950 1780,3950 2360,3370 2360,3330 2840,2850
NewNet124: J.R/W U.PF9 | length 3651.3
  Top Layer w10: 2810,2840 2830,2820 3090,2820 3190,2720 3530,2720 3550.79,2740.79 U.PF9@3734.65,2740.79
  Top Layer w16: J.R/W@837.32,4439.37 837.32,4412.68 1330,3920 1760,3920 2330,3350 2330,3320 2810,2840
NewNet125: J.RS U.PF10 | length 3765.6
  Top Layer w10: 2800,2800 3080,2800 3180,2700 3540,2700 3561.1,2721.1 U.PF10@3734.65,2721.1
  Top Layer w16: J.RS@737.32,4439.37 737.32,4402.68 790,4350 840,4350 1300,3890 1740,3890 2300,3330 2300,3300 2800,2800
NewNet126: pad.0@2980,1920 U.PC1 | length 1244.9
  Top Layer w10: pad.0@2980,1920 3020,1960 3020,2050 3120,2150 3120,2230 3220,2330 3220,2500 3280,2560 3390,2560 3420,2590 3580,2590 3612.68,2622.68 U.PC1@3734.65,2622.68
NewNet127: Designator101.3 U.PA4-SPI1NSS | length 1176.4
  Top Layer w10: 3540,1670 3820,1950 3820,2250 3864.57,2294.57 U.PA4-SPI1NSS@3864.57,2374.65
  Top Layer w16: Designator101.3@3310,1510 3310,1580 3400,1670 3540,1670
NewNet128: Designator56.SCLK Designator102.3 U.PA5-SPI1SCK | length 4229.7
  Top Layer w10: 3240,1460 3350,1460 ; 3570,1640 3840,1910 3840,2240 3884.25,2284.25 U.PA5-SPI1SCK@3884.25,2374.65
  Top Layer w16: Designator56.SCLK@2617.17,4010 2617.17,3802.83 v1(2620,3800) ; Designator102.3@3190,1510 3240,1460 ; 3350,1460 3370,1480 3370,1580 3430,1640 3570,1640
  Bottom Layer w16: v1(2620,3800) 2630,3790 2670,3790 2810,3650 2810,1770 3070,1510 Designator102.3@3190,1510
NewNet129: Designator56.MISO Designator100.3 U.PA6-SPI1MISO | length 4131.7
  Top Layer w10: 3600,1610 3860,1870 3860,2230 3903.94,2273.94 U.PA6-SPI1MISO@3903.94,2374.65
  Top Layer w16: v1@2700,3840 2705.75,3845.75 v1(2705.75,3850) Designator56.MISO@2705.75,4010 ; Designator100.3@3430,1510 3430,1550 3490,1610 3600,1610
  Bottom Layer w16: v1@2700,3860 2700,3810 2840,3670 2840,1790 3010,1620 3320,1620 Designator100.3@3430,1510
NewNet130: Designator56.MOSI Designator99.3@3550,1510 U.PA7-SPI1MOSI | length 4422.5
  Top Layer w10: 3610,1570 3880,1840 3880,2220 3923.62,2263.62 U.PA7-SPI1MOSI@3923.62,2374.65
  Top Layer w16: Designator56.MOSI@2528.58,4010 2528.58,3958.58 2490,3920 2490,3850 2600,3740 2760,3740 v1(2820,3800) ; Designator99.3@3550,1510 3610,1570
  Bottom Layer w16: v1(2820,3800) 2870,3750 2870,1810 3030,1650 3430,1650 3550,1530 Designator99.3@3550,1510
NewNet131: M.CSN U.PC4 | length 1975.4
  Top Layer w10: v1(3760,1420) 3760,1680 3900,1820 3900,2210 3943.31,2253.31 U.PC4@3943.31,2374.65
  Bottom Layer w16: M.CSN@3340,1020 3340,950 3350,940 3710,940 3760,990 v1(3760,1420)